# Altium PCB COREV1.1_pcb5_0.PcbDoc (part 2 of 14)
Units mil, origin at the board's own origin, x right, y up, seen from the top; angles counter-clockwise.
Board outline 2860 x 2420 mil, 6 copper layers (Top Layer, GND, SIGNAL_1, SIGNAL_2, POWER, Bottom Layer); 110 components, 241 nets, 882 pads, 697 vias.
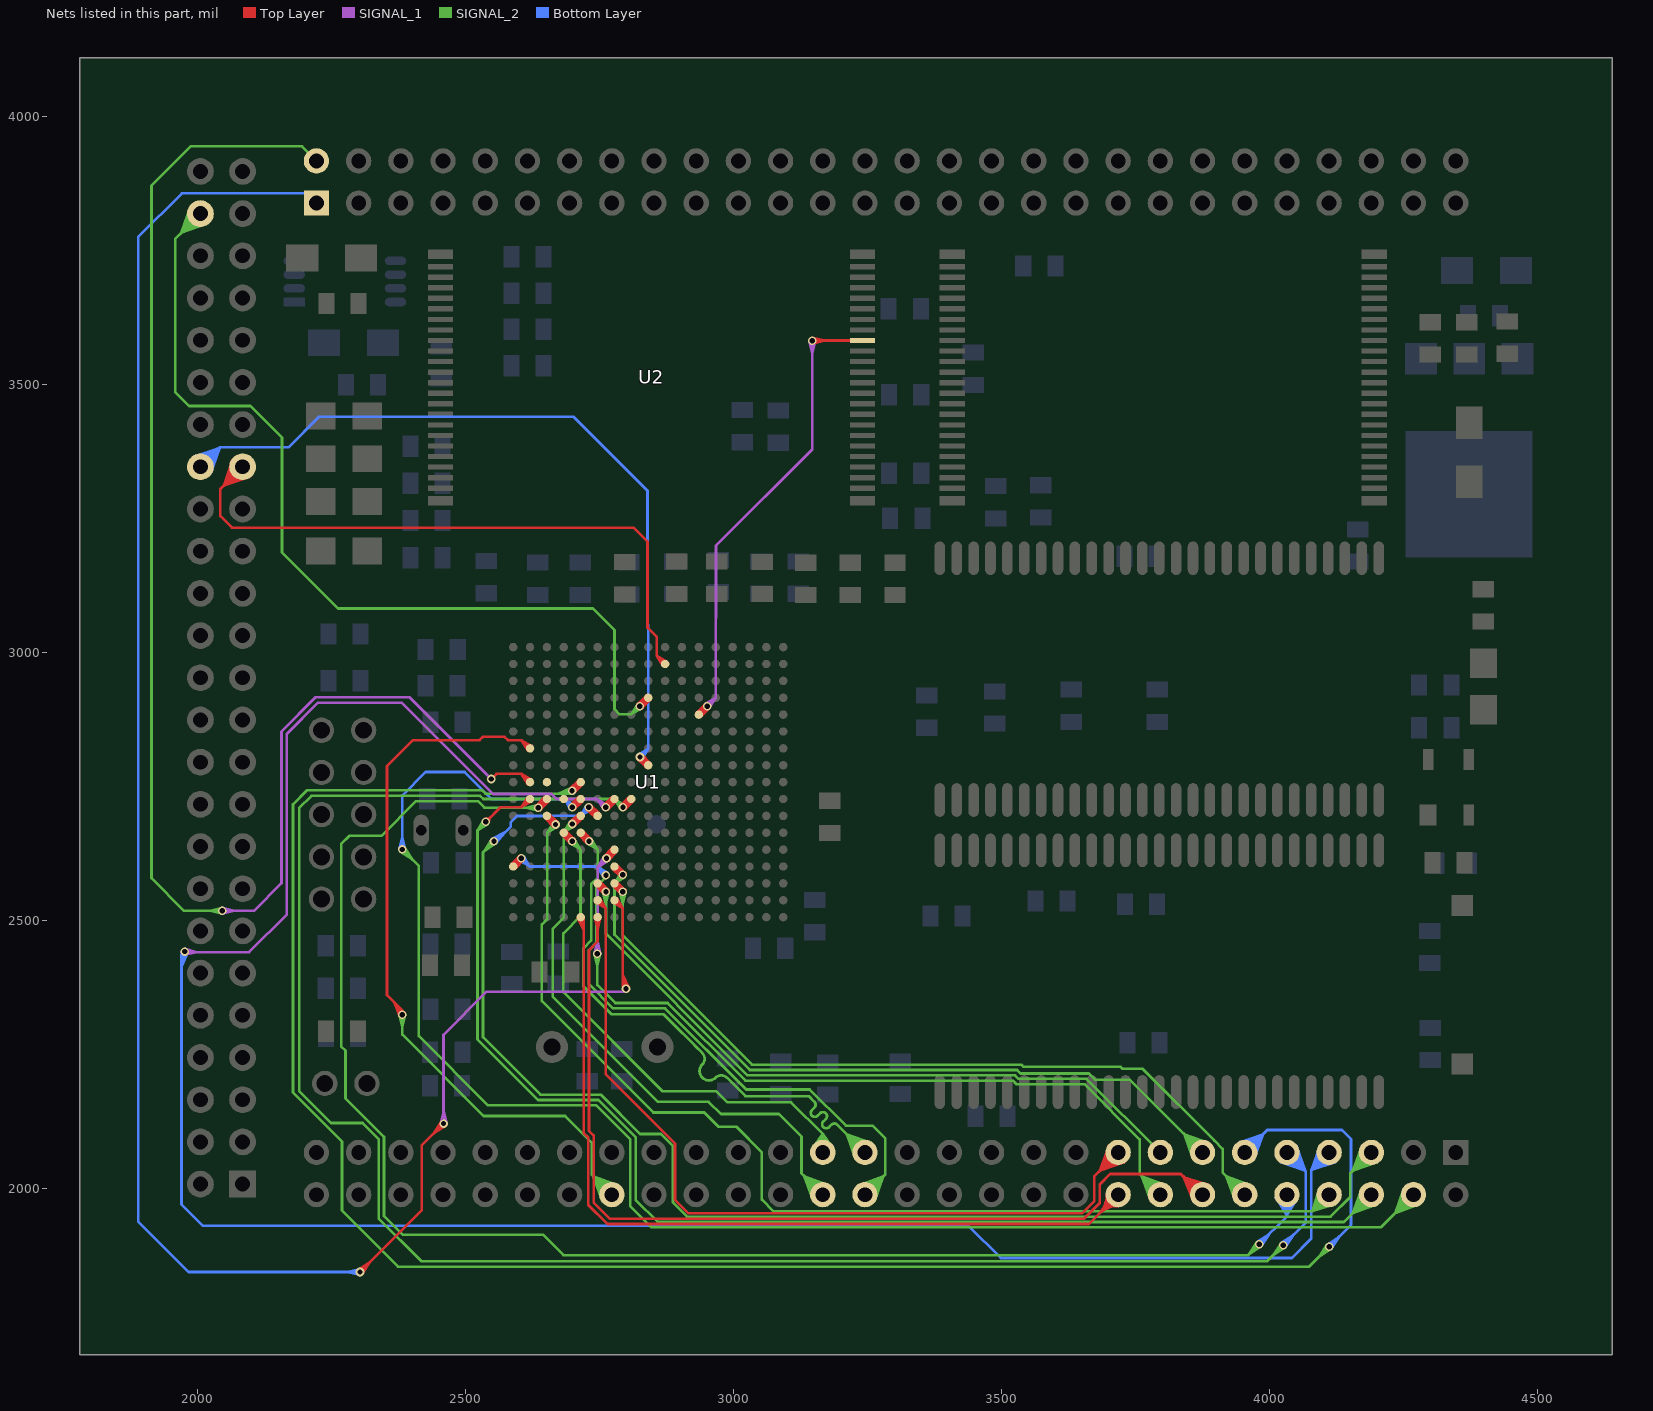
[diagram p6: the nets of this part, all layers, seen from the top]

## Via types
v1: diameter 16, hole 10, Top Layer to Bottom Layer, tented both sides, 638 vias
v2: diameter 30, hole 18, Top Layer to Bottom Layer, tented both sides, 56 vias
v3: diameter 16, hole 10, Top Layer to Bottom Layer, 2 vias
v4: diameter 30, hole 16, Top Layer to Bottom Layer, tented both sides, 1 vias

## Nets (pads, with @x,y where several pads share a name; then routed paths per layer and width w, separated by ;. In a path a pad name is that pad's centre, name@x,y a point inside that pad or via, vN(x,y) a via of type N, cw(c..) or ccw(c..) an arc to the next point about the centre after c; other vN are vias at no path point) (continued)
CAMDATA6: pad.PB36 U1.J8 | length 3053.7
  Top Layer w5: v1@2821.19,2801.61 U1.J8@2836.65,2786.33 ; v1@2823.32,2799.96 U1.J8@2844.19,2793.87 ; v1@2825.52,2799.5 cw(c2825.52,2786.22) 2834.91,2795.61 cw(c2844.29,2805) v1@2831.02,2805 ; v1@2828.91,2809.33 U1.J8@2844.19,2793.87 ; v1@2830.56,2807.2 U1.J8@2836.65,2786.33 ; U1.J8@2835.51,2789.63 ccw(c2822.54,2789.63) 2831.71,2798.8 ccw(c2840.89,2807.98) U1.J8@2840.89,2795 ; v1(2825.52,2805) U1.J8@2840.89,2789.63 ; v1(2825.52,2805) U1.J8@2844.19,2793.87 ; v1(2825.52,2805) U1.J8@2836.65,2786.33 ; v1(2825.52,2805) U1.J8@2840.89,2789.63 ; U1.J8@2840.89,2789.63 2822.15,2800.65 U1.J8@2840.89,2789.63 ; U1.J8@2840.89,2789.63 2829.87,2808.37 U1.J8@2840.89,2789.63
  Bottom Layer w5: pad.PB36@1993.31,3365.64 2040.87,3382.19 ; pad.PB36@1993.59,3365.82 2038.68,3380 ; pad.PB36@1995.22,3360.92 2040.87,3382.19 ; pad.PB36@1995.39,3361.03 2038.68,3380 ; pad.PB36@1997.59,3356.45 2040.87,3382.19 ; pad.PB36@1997.67,3356.51 2038.68,3380 ; pad.PB36@2000.37,3352.27 2040.87,3382.19 ; pad.PB36@2000.39,3352.29 2038.68,3380 ; pad.PB36@2005.78,3359.07 ccw(c2006.88,3385.22) 2025.39,3366.71 ccw(c2043.9,3348.21) pad.PB36@2017.75,3347.11 ; pad.PB36@2005.99,3364.07 ccw(c2007.53,3400.68) 2033.44,3374.77 ccw(c2059.36,3348.86) pad.PB36@2022.74,3347.32 ; pad.PB36@2006.2,3369.06 ccw(c2008.18,3416.13) 2041.5,3382.82 ; pad.PB36@2006.55,3359.02 ccw(c2008.75,3380.22) 2023.82,3365.15 ccw(c2038.9,3350.07) pad.PB36@2017.69,3347.87 ; pad.PB36@2007.06,3363.99 ccw(c2010.14,3393.68) 2031.25,3372.57 ccw(c2052.36,3351.46) pad.PB36@2022.67,3348.39 ; pad.PB36@2007.58,3368.96 ccw(c2011.54,3407.14) 2038.68,3380 ; pad.PB36@2015.13,3338.91 2040.87,3382.19 ; pad.PB36@2015.19,3338.99 2038.68,3380 ; pad.PB36@2019.6,3336.55 2040.87,3382.19 ; pad.PB36@2019.71,3336.71 2038.68,3380 ; pad.PB36@2024.32,3334.63 2040.87,3382.19 ; pad.PB36@2024.5,3334.92 2038.68,3380 ; pad.PB36@2027.64,3348.9 cw(c2065.82,3352.86) 2038.68,3380 ; pad.PB36@2027.74,3347.53 cw(c2074.81,3349.51) 2041.5,3382.82 ; v1@2822.15,2809.35 2840.89,2820.37 ; v1(2825.52,2805) 2840.89,2820.37 ; v1@2825.52,2810.5 ccw(c2825.52,2823.78) 2834.91,2814.39 ccw(c2844.29,2805) v1@2831.02,2805 ; v1@2829.87,2801.63 2840.89,2820.37 ; 2840.89,3010.1 2840.89,2926 ; 2038.68,3380 2010.97,3341.72 2040.87,3382.19 ; 2038.68,3380 pad.PB36@2005.26,3346.58 2041.5,3382.82 ; 2041.5,3382.82 2169.61,3382.82 2226.78,3440 2701.36,3440 2839.5,3301.86 2839.5,3052.58 2840.89,3051.19 2840.89,2926 ; 2840.89,2820.37 2840.89,2926
CAMDATA7: pad.PB35 U1.H2 | length 1857.2
  Top Layer w5: pad.PB35@2061.5,3346.58 cw(c2007.18,3346.58) 2045.59,3308.17 cw(c2084,3269.76) pad.PB35@2084,3324.08 ; pad.PB35@2064.94,3358.54 2048.39,3310.98 ; pad.PB35@2066.5,3346.58 cw(c2024.25,3346.58) 2054.13,3316.71 cw(c2084,3286.83) pad.PB35@2084,3329.08 ; pad.PB35@2069.66,3356.62 2048.39,3310.98 ; pad.PB35@2071.5,3346.58 cw(c2041.32,3346.58) 2062.66,3325.24 cw(c2084,3303.9) pad.PB35@2084,3334.08 ; pad.PB35@2074.13,3354.26 2048.39,3310.98 ; pad.PB35@2078.32,3351.48 2048.39,3310.98 ; pad.PB35@2084,3346.58 2042.5,3305.08 2042.5,3254.5 2064,3233 2813.83,3233 2839.5,3207.33 2839.5,3046.5 2857,3029 2857,2993.99 ; pad.PB35@2088.89,3340.9 2048.39,3310.98 ; pad.PB35@2091.67,3336.71 2048.39,3310.98 ; pad.PB35@2094.04,3332.25 2048.39,3310.98 ; pad.PB35@2095.95,3327.52 2048.39,3310.98 ; U1.H2@2867.01,2978.61 ccw(c2854.03,2978.61) 2863.21,2987.78 ccw(c2872.38,2996.95) U1.H2@2872.38,2983.98 ; U1.H2@2868.14,2975.3 2857,2993.99 ; U1.H2@2872.38,2980.12 U1.H2@2872.38,2978.61 ; U1.H2@2875.68,2982.85 2857,2993.99 ; 2857,2993.99 U1.H2@2872.38,2978.61 ; 2857,2993.99 U1.H2@2872.38,2978.61
CAMRST: pad.PB48 U1.J4 | length 2732.9
  Top Layer w5: v1@2820.95,2903.4 U1.J4@2836.65,2918.92 ; v1@2823.05,2905.03 U1.J4@2844.2,2911.38 ; v1@2825.27,2905.5 ccw(c2825.27,2918.78) 2834.66,2909.39 ccw(c2844.05,2900) v1@2830.77,2900 ; v1@2828.67,2895.68 U1.J4@2844.2,2911.38 ; v1@2830.3,2897.77 U1.J4@2836.65,2918.92 ; U1.J4@2835.51,2915.61 cw(c2822.54,2915.61) 2831.71,2906.44 cw(c2840.89,2897.27) U1.J4@2840.89,2910.24 ; v1(2825.27,2900) U1.J4@2840.89,2915.61 ; v1(2825.27,2900) U1.J4@2836.65,2918.92 ; v1(2825.27,2900) U1.J4@2844.2,2911.38 ; v1(2825.27,2900) U1.J4@2840.89,2915.61 ; U1.J4@2840.89,2915.61 2829.62,2896.63 U1.J4@2840.89,2915.61 ; U1.J4@2840.89,2915.61 2821.9,2904.34 U1.J4@2840.89,2915.61
  SIGNAL_2 w5: pad.PB48@1982.76,3819.02 cw(c1928.44,3819.02) 1966.85,3780.61 cw(c2005.26,3742.2) pad.PB48@2005.26,3796.52 ; pad.PB48@1986.2,3830.98 1969.65,3783.42 ; pad.PB48@1987.76,3819.02 cw(c1945.51,3819.02) 1975.39,3789.15 cw(c2005.26,3759.28) pad.PB48@2005.26,3801.52 ; pad.PB48@1990.92,3829.06 1969.65,3783.42 ; pad.PB48@1992.76,3819.02 cw(c1962.58,3819.02) 1983.92,3797.69 cw(c2005.26,3776.35) pad.PB48@2005.26,3806.52 ; pad.PB48@1995.39,3826.7 1969.65,3783.42 ; pad.PB48@1999.58,3823.92 1969.65,3783.42 ; pad.PB48@2010.15,3813.34 1969.65,3783.42 ; pad.PB48@2012.93,3809.16 1969.65,3783.42 ; pad.PB48@2015.3,3804.69 1969.65,3783.42 ; pad.PB48@2017.21,3799.96 1969.65,3783.42 ; 2815.04,2890.26 cw(c2825.27,2880.02) v1@2825.27,2894.5 ; 2816.23,2891.46 ccw(c2807.69,2900) v1@2819.77,2900 ; v1@2820.98,2903.44 2809.52,2884.74 ; v1@2828.57,2895.6 2809.52,2884.74 ; 1969.65,3783.42 pad.PB48@2005.26,3819.02 1958,3771.76 1958,3485.86 1983.86,3460 2098.86,3460 2157.5,3401.36 2157.5,3186.5 2261.89,3082.11 2737.89,3082.11 2778.02,3041.98 2778.02,2894.32 2787.6,2884.74 2809.52,2884.74 ; 2809.52,2884.74 v1(2825.27,2900) 2824.78,2900 2809.52,2884.74
CDCLK: pad.PA42 U1.T7 | length 2210.4
  Top Layer w5: 2366.9,2347.18 cw(c2343.72,2324) v1@2376.5,2324 ; 2375.43,2338.65 cw(c2360.79,2324) v1@2381.5,2324 ; v1@2377.11,2321.48 2366.99,2347.09 ; v1@2386.29,2327.44 2366.99,2347.09 ; 2609.96,2830.83 ccw(c2620.41,2841.28) U1.T7@2620.41,2826.5 ; 2611.77,2829.02 cw(c2603.87,2821.13) U1.T7@2615.04,2821.13 ; U1.T7@2616.26,2817.71 2604.29,2836.5 ; U1.T7@2623.62,2825.43 2604.29,2836.5 ; 2366.99,2347.09 v1(2382,2324) 2382,2332.08 2353.5,2360.58 2353.5,2787.93 2402.07,2836.5 2526,2836.5 2532.12,2842.62 2573,2842.62 2579.12,2836.5 2604.29,2836.5 ; 2604.29,2836.5 U1.T7@2620.41,2821.13 2619.66,2821.13 2604.29,2836.5
  SIGNAL_2 w5: v1@2376.54,2323.34 2382,2301 v1@2387.46,2323.34 ; v1@2378.11,2320.11 cw(c2368.72,2310.72) 2382,2310.72 cw(c2395.28,2310.72) v1@2385.89,2320.11 ; v1(2382,2324) 2382,2286.8 2533.8,2135 2686,2135 2735.36,2085.64 2735.36,2025.93 pad.PA42@2772.98,1988.32 ; pad.PA42@2751.85,1988.32 ccw(c2700.86,1988.32) 2736.92,2024.37 ccw(c2772.98,2060.43) pad.PA42@2772.98,2009.44 ; pad.PA42@2755.14,1977 2738.75,2022.54 ; pad.PA42@2756.85,1988.32 ccw(c2717.93,1988.32) 2745.45,2015.84 ccw(c2772.98,2043.36) pad.PA42@2772.98,2004.44 ; pad.PA42@2759.84,1978.97 2738.75,2022.54 ; pad.PA42@2761.85,1988.32 ccw(c2735,1988.32) 2753.99,2007.3 ccw(c2772.98,2026.29) pad.PA42@2772.98,1999.44 ; pad.PA42@2764.26,1981.41 2738.75,2022.54 ; pad.PA42@2768.38,1984.27 2738.75,2022.54 ; pad.PA42@2777.02,1992.91 2738.75,2022.54 ; pad.PA42@2779.89,1997.03 2738.75,2022.54 ; pad.PA42@2782.32,2001.46 2738.75,2022.54 ; pad.PA42@2784.29,2006.15 2738.75,2022.54
CLE: U1.F5 U2.16 | length 1439.8
  Top Layer w5: U1.F5@2935.37,2889.49 ccw(c2935.37,2902.47) 2944.55,2893.29 ccw(c2953.72,2884.12) U1.F5@2940.75,2884.12 ; 2941.43,2890.17 ccw(c2931.6,2900) v1@2945.5,2900 ; 2942.05,2890.79 cw(c2951,2881.84) v1@2951,2894.5 ; v1@2945.96,2902.2 U1.F5@2939.61,2880.81 ; v1@2946.63,2903.34 U1.F5@2935.37,2884.12 ; v1@2947.56,2904.29 U1.F5@2932.06,2888.35 ; v1@2953.28,2894.99 U1.F5@2932.06,2888.35 ; v1@2954.41,2895.69 U1.F5@2935.37,2884.12 ; v1@2955.35,2896.63 U1.F5@2939.61,2880.81 ; v1@3147.47,3586.98 3170.03,3582.26 ; v1@3147.84,3576.06 3170.03,3582.26 ; v1@3150.89,3577.61 cw(c3162.12,3566.38) 3162.12,3582.26 ; v1@3150.89,3585.39 ccw(c3158.43,3592.93) 3158.43,3582.26 ; 3202.2,3582.26 U2.16@3222.13,3582.26 ; U2.16@3220.41,3580.55 ccw(c3216.28,3576.42) 3216.28,3582.26 ccw(c3216.28,3588.11) U2.16@3220.41,3583.98 ; U2.16@3240.83,3582.26 3147.76,3582.26 v1(3147,3581.5) 3170.03,3582.26 ; U1.F5@2932.06,2888.35 v1(2951,2900) ; U1.F5@2932.06,2888.35 v1@2951,2899.74 ; U1.F5@2935.37,2884.12 v1(2951,2900) ; U1.F5@2935.37,2884.12 v1@2951,2899.74 ; U1.F5@2939.61,2880.81 v1(2951,2900) ; U1.F5@2939.61,2880.81 v1@2951,2899.74 ; v1@2951,2899.74 v1(2951,2900)
  SIGNAL_1 w5: v1@2947.62,2904.34 2966.87,2915.87 ; v1(2951,2900) 2966.87,2915.87 ; v1@2951,2905.5 ccw(c2951,2918.78) 2960.39,2909.39 ccw(c2969.78,2900) v1@2956.5,2900 ; v1@2955.34,2896.62 2966.87,2915.87 ; v1@3141.54,3580.84 3147,3558.5 ; v1@3143.11,3577.61 cw(c3133.72,3568.22) 3147,3568.22 cw(c3160.28,3568.22) v1@3150.89,3577.61 ; v1@3152.46,3580.84 3147,3558.5 ; 2966.87,2915.87 2966.87,3063.95 2967.5,3064.58 2967.5,3199.64 3147,3379.14 v1(3147,3581.5) 3147,3558.5
CLKOUT0: U1.R9
CLKOUT1: U1.P10
DN0: pad.PA31 U1.P12 | length 1640.8
  Top Layer w5: U1.P12@2683.41,2658.27 cw(c2683.41,2645.3) 2692.58,2654.47 cw(c2701.75,2663.65) U1.P12@2688.78,2663.65 ; v1@2693.5,2648.05 ccw(c2680.22,2648.05) 2689.61,2657.44 ccw(c2699,2666.83) v1@2699,2653.55 ; v1@2693.97,2645.83 U1.P12@2687.64,2666.95 ; v1@2694.66,2644.68 U1.P12@2683.41,2663.65 ; v1@2695.6,2643.73 U1.P12@2680.1,2659.41 ; v1@2701.22,2653.08 U1.P12@2680.1,2659.41 ; v1@2702.37,2652.4 U1.P12@2683.41,2663.65 ; v1@2703.32,2651.45 U1.P12@2687.64,2666.95 ; U1.P12@2680.1,2659.41 v1(2699,2648.05) ; U1.P12@2680.1,2659.41 v1(2699,2648.05) ; U1.P12@2683.41,2663.65 v1(2699,2648.05) ; U1.P12@2683.41,2663.65 v1(2699,2648.05) ; U1.P12@2687.64,2666.95 v1(2699,2648.05) ; U1.P12@2687.64,2666.95 v1(2699,2648.05)
  SIGNAL_2 w5: v1@2695.63,2643.71 2714.56,2632.49 ; v1@2699,2642.55 cw(c2699,2629.27) 2708.39,2638.66 cw(c2717.78,2648.05) v1@2704.5,2648.05 ; v1(2699,2648.05) 2714.56,2632.49 ; v1@2703.34,2651.42 2714.56,2632.49 ; pad.PA31@3146.59,2073.58 3166.68,2101.24 ; pad.PA31@3151.01,2070.86 3166.68,2101.24 ; pad.PA31@3155.7,2068.87 3166.68,2101.24 ; pad.PA31@3157.23,2085.95 ccw(c3149.58,2101.24) 3166.68,2101.24 ; pad.PA31@3159.46,2081.47 ccw(c3153.62,2093.15) 3166.68,2093.15 ccw(c3179.73,2093.15) pad.PA31@3173.89,2081.47 ; pad.PA31@3160.58,2067.6 3166.68,2101.24 ; pad.PA31@3166.68,2067.06 3166.68,2101.24 ; pad.PA31@3172.78,2067.6 3166.68,2101.24 ; pad.PA31@3176.13,2085.95 cw(c3183.78,2101.24) 3166.68,2101.24 ; pad.PA31@3177.65,2068.87 3166.68,2101.24 ; pad.PA31@3182.35,2070.86 3166.68,2101.24 ; pad.PA31@3186.77,2073.58 3166.68,2101.24 ; 2714.56,2632.49 2714.56,2507.98 2682.5,2475.92 2682.5,2366.07 2867.07,2181.5 2967.58,2181.5 2988.58,2160.5 3107.42,2160.5 3166.68,2101.24
DN1: pad.PA29 U1.N12 | length 2010.2
  Top Layer w5: U1.N12@2714.9,2658.27 cw(c2714.9,2645.3) 2724.08,2654.47 cw(c2733.25,2663.65) U1.N12@2720.28,2663.65 ; v1@2725,2648.05 ccw(c2711.72,2648.05) 2721.11,2657.44 ccw(c2730.5,2666.83) v1@2730.5,2653.55 ; v1@2725.47,2645.82 U1.N12@2719.14,2666.95 ; v1@2726.16,2644.67 U1.N12@2714.9,2663.65 ; v1@2727.1,2643.72 U1.N12@2711.59,2659.41 ; v1@2732.72,2653.08 U1.N12@2711.59,2659.41 ; v1@2733.87,2652.39 U1.N12@2714.9,2663.65 ; v1@2734.82,2651.45 U1.N12@2719.14,2666.95 ; U1.N12@2711.59,2659.41 v1(2730.5,2648.05) ; U1.N12@2711.59,2659.41 v1(2730.5,2648.05) ; U1.N12@2714.9,2663.65 v1(2730.5,2648.05) ; U1.N12@2714.9,2663.65 v1(2730.5,2648.05) ; U1.N12@2719.14,2666.95 v1(2730.5,2648.05) ; U1.N12@2719.14,2666.95 v1(2730.5,2648.05)
  SIGNAL_2 w5: v1@2727.11,2643.72 2746.55,2632 ; v1@2730.5,2642.55 cw(c2730.5,2629.27) 2739.89,2638.66 cw(c2749.28,2648.05) v1@2736,2648.05 ; v1(2730.5,2648.05) 2746.55,2632 ; v1@2734.83,2651.44 2746.55,2632 ; 2927.6,2266.59 2941.87,2252.31 ; 3172.29,2129.57 3167.69,2124.97 ccw(c3173,2119.67) 3167.69,2114.37 ccw(c3173,2119.67) 3178.3,2114.36 3182.9,2118.97 cw(c3188.2,2113.66) 3193.5,2118.97 ; 3172.3,2129.58 ccw(c3166.99,2134.88) 3172.29,2140.18 ccw(c3166.99,2134.88) 3161.69,2140.18 3157.09,2135.58 cw(c3151.78,2140.88) 3146.48,2135.58 cw(c3151.78,2140.88) 3146.48,2146.18 3151.08,2150.79 ccw(c3145.78,2156.09) 3151.08,2161.39 3140.47,2172 3022.19,2172 2987.56,2206.62 ccw(c2977.09,2196.15) 2966.62,2206.62 cw(c2954.25,2219) 2941.87,2206.62 cw(c2954.25,2219) 2941.87,2231.37 ccw(c2931.41,2241.84) 2941.87,2252.31 ; 3198.81,2113.66 3193.51,2118.97 ; pad.PA29@3224.3,2067.06 ccw(c3173.3,2067.06) 3209.36,2103.11 ccw(c3245.42,2139.17) pad.PA29@3245.42,2088.18 ; pad.PA29@3227.58,2055.74 3211.19,2101.28 ; pad.PA29@3229.3,2067.06 ccw(c3190.37,2067.06) 3217.9,2094.58 ccw(c3245.42,2122.1) pad.PA29@3245.42,2083.18 ; pad.PA29@3232.28,2057.71 3211.19,2101.28 ; pad.PA29@3234.3,2067.06 ccw(c3207.45,2067.06) 3226.43,2086.04 ccw(c3245.42,2105.03) pad.PA29@3245.42,2078.18 ; pad.PA29@3236.7,2060.15 3211.19,2101.28 ; pad.PA29@3240.82,2063.01 3211.19,2101.28 ; pad.PA29@3245.42,2067.06 3193.51,2118.97 ; pad.PA29@3249.46,2071.65 3211.19,2101.28 ; pad.PA29@3252.33,2075.77 3211.19,2101.28 ; pad.PA29@3254.76,2080.2 3211.19,2101.28 ; pad.PA29@3256.74,2084.89 3211.19,2101.28 ; 2746.55,2632 2746.55,2609.58 2746.5,2609.53 2746.5,2579.58 2734.56,2567.64 2734.56,2462.62 2720.02,2448.08 2720.02,2377.2 2772.22,2325 2869.19,2325 2941.87,2252.31
DP0: pad.PA32 U1.N11 | length 2083
  Top Layer w5: v1@2694.76,2683.5 U1.N11@2710.66,2698.44 ; v1@2696.9,2685.08 U1.N11@2718.2,2690.9 ; v1@2699,2685.5 ccw(c2699,2700.61) U1.N11@2709.69,2689.93 ; v1@2702.29,2675.59 U1.N11@2718.2,2690.9 ; v1@2703.98,2677.67 U1.N11@2710.66,2698.44 ; v1@2704.5,2680 cw(c2715.94,2680) 2707.85,2688.09 ; U1.N11@2709.53,2695.14 cw(c2696.55,2695.14) 2705.73,2685.97 cw(c2714.9,2676.79) U1.N11@2714.9,2689.77 ; v1(2699,2680) U1.N11@2718.2,2690.9 ; v1(2699,2680) U1.N11@2714.9,2695.14 ; v1(2699,2680) U1.N11@2710.66,2698.44 ; v1(2699,2680) U1.N11@2714.9,2695.14 ; v1(2699,2680) v1@2699.76,2680 ; v1@2699.76,2680 U1.N11@2714.9,2695.14 ; v1@2699.76,2680 U1.N11@2710.66,2698.44 ; v1@2699.76,2680 U1.N11@2718.2,2690.9 ; v1@2699.76,2680 U1.N11@2714.9,2695.14 ; U1.N11@2714.9,2695.14 2703.26,2676.52 U1.N11@2714.9,2695.14 ; U1.N11@2714.9,2695.14 2695.74,2684.43 U1.N11@2714.9,2695.14
  SIGNAL_2 w5: v1@2693.5,2680 cw(c2680.22,2680) 2689.61,2670.61 cw(c2699,2661.22) v1@2699,2674.5 ; v1@2694.65,2683.37 2683.5,2664.5 ; v1@2702.37,2675.65 2683.5,2664.5 ; pad.PA32@3145.56,1988.32 ccw(c3094.56,1988.32) 3130.62,2024.37 ccw(c3166.68,2060.43) pad.PA32@3166.68,2009.44 ; pad.PA32@3148.84,1977 3132.45,2022.54 ; pad.PA32@3150.56,1988.32 ccw(c3111.63,1988.32) 3139.16,2015.84 ccw(c3166.68,2043.36) pad.PA32@3166.68,2004.44 ; pad.PA32@3153.54,1978.97 3132.45,2022.54 ; pad.PA32@3155.56,1988.32 ccw(c3128.71,1988.32) 3147.69,2007.3 ccw(c3166.68,2026.29) pad.PA32@3166.68,1999.44 ; pad.PA32@3157.96,1981.41 3132.45,2022.54 ; pad.PA32@3162.08,1984.27 3132.45,2022.54 ; pad.PA32@3166.68,1988.32 3127,2027.99 3127,2096.5 3084.82,2138.68 2976.61,2138.68 2953.8,2161.5 2858.78,2161.5 2662.5,2357.78 2662.5,2484.2 2683.5,2505.2 2683.5,2664.5 ; pad.PA32@3170.72,1992.91 3132.45,2022.54 ; pad.PA32@3173.59,1997.03 3132.45,2022.54 ; pad.PA32@3176.02,2001.46 3132.45,2022.54 ; pad.PA32@3178,2006.15 3132.45,2022.54 ; 2683.5,2664.5 v1(2699,2680) 2683.5,2664.5
DP1: pad.PA30 U1.U14 | length 2206.7
  Top Layer w5: U1.U14@2588.92,2606.03 ccw(c2588.92,2619) 2598.09,2609.83 ccw(c2607.26,2600.65) U1.U14@2594.29,2600.65 ; v1@2598.76,2616 cw(c2585.48,2616) 2594.87,2606.61 cw(c2604.26,2597.22) v1@2604.26,2610.5 ; v1@2599.22,2618.19 U1.U14@2593.16,2597.35 ; v1@2599.91,2619.36 U1.U14@2588.92,2600.65 ; v1@2600.87,2620.33 U1.U14@2585.62,2604.9 ; v1@2606.45,2610.96 U1.U14@2585.62,2604.9 ; v1@2607.63,2611.65 U1.U14@2588.92,2600.65 ; v1@2608.59,2612.61 U1.U14@2593.16,2597.35 ; U1.U14@2585.62,2604.9 v1(2604.26,2616) ; U1.U14@2585.62,2604.9 v1(2604.26,2616) ; U1.U14@2588.92,2600.65 v1(2604.26,2616) ; U1.U14@2588.92,2600.65 v1(2604.26,2616) ; U1.U14@2593.16,2597.35 v1(2604.26,2616) ; U1.U14@2593.16,2597.35 v1(2604.26,2616)
  SIGNAL_2 w5: v1(2762,2584.5) 2762,2580.94 2744.56,2563.5 2744.56,2458.48 2730.02,2443.94 2730.02,2381.34 2775.36,2336 2872.33,2336 3023.83,2184.5 3142.12,2184.5 3209.62,2117 3259.5,2117 3283.5,2093 3283.5,2026.4 pad.PA30@3245.42,1988.32 ; pad.PA30@3234.1,2006.15 3279.65,2022.54 ; pad.PA30@3236.08,2001.46 3279.65,2022.54 ; pad.PA30@3238.51,1997.03 3279.65,2022.54 ; pad.PA30@3241.37,1992.91 3279.65,2022.54 ; pad.PA30@3245.42,1999.44 ccw(c3245.42,2026.29) 3264.4,2007.3 ccw(c3283.39,1988.32) pad.PA30@3256.54,1988.32 ; pad.PA30@3245.42,2004.44 ccw(c3245.42,2043.36) 3272.94,2015.84 ccw(c3300.46,1988.32) pad.PA30@3261.54,1988.32 ; pad.PA30@3245.42,2009.44 ccw(c3245.42,2060.43) 3281.48,2024.37 ccw(c3317.53,1988.32) pad.PA30@3266.54,1988.32 ; pad.PA30@3250.01,1984.27 3279.65,2022.54 ; pad.PA30@3254.13,1981.41 3279.65,2022.54 ; pad.PA30@3258.56,1978.97 3279.65,2022.54 ; pad.PA30@3263.25,1977 3279.65,2022.54
  Bottom Layer w5: v1@2600.9,2611.65 2619.48,2600.78 ; v1@2604.26,2610.5 cw(c2604.26,2597.22) 2613.65,2606.61 cw(c2623.04,2616) v1@2609.76,2616 ; v1(2604.26,2616) 2619.48,2600.78 ; v1@2608.62,2619.36 2619.48,2600.78 ; v1@2756.5,2584.5 ccw(c2743.22,2584.5) 2752.61,2593.89 ccw(c2762,2603.28) v1@2762,2590 ; v1@2757.67,2581.1 2745.72,2600.78 ; v1@2765.4,2588.83 2745.72,2600.78 ; 2619.48,2600.78 2745.72,2600.78 ; 2745.72,2600.78 v1(2762,2584.5) 2745.72,2600.78
EINT0: pad.PA18 U1.N17 | length 1876.6
  Top Layer w5: U1.N17@2709.82,2504.42 2720.5,2481.57 ; U1.N17@2711.1,2502.36 cw(c2688.41,2479.68) 2720.5,2479.68 ; U1.N17@2714.64,2505.9 cw(c2700.48,2491.75) 2720.5,2491.75 ; U1.N17@2717.03,2501.23 cw(c2718.28,2498.34) 2720.5,2500.57 ; U1.N17@2719.84,2504.03 ccw(c2722.72,2502.79) 2720.5,2500.57 ; U1.N17@2720.24,2506.79 2720.5,2481.57 ; pad.PA18@3696.74,1988.32 cw(c3645.74,1988.32) 3681.8,1952.26 cw(c3717.86,1916.2) pad.PA18@3717.86,1967.19 ; pad.PA18@3701.74,1988.32 cw(c3662.81,1988.32) 3690.34,1960.79 cw(c3717.86,1933.27) pad.PA18@3717.86,1972.19 ; pad.PA18@3706.74,1988.32 cw(c3679.89,1988.32) 3698.87,1969.33 cw(c3717.86,1950.34) pad.PA18@3717.86,1977.19 ; pad.PA18@3717.86,1988.32 3663.04,1933.5 2764.86,1933.5 2729,1969.36 2729,2094.86 2720.5,2103.36 2720.5,2500.57 ; 2720.5,2481.57 U1.N17@2714.9,2506.16 2720.5,2500.57
EINT1: pad.PA17 U1.M16 | length 2213.3
  Top Layer w5: U1.M16@2743.1,2533.42 2761.77,2522.29 ; U1.M16@2746.4,2532.29 cw(c2746.4,2519.31) 2755.57,2528.49 cw(c2764.75,2537.66) U1.M16@2751.77,2537.66 ; U1.M16@2746.4,2537.66 2761.77,2522.29 ; U1.M16@2750.64,2540.96 2761.77,2522.29 ; pad.PA17@3696.74,2067.06 cw(c3645.74,2067.06) 3681.8,2031 cw(c3717.86,1994.94) pad.PA17@3717.86,2045.93 ; pad.PA17@3700.02,2078.37 3683.63,2032.83 ; pad.PA17@3701.74,2067.06 cw(c3662.81,2067.06) 3690.34,2039.53 cw(c3717.86,2012.01) pad.PA17@3717.86,2050.93 ; pad.PA17@3704.72,2076.4 3683.63,2032.83 ; pad.PA17@3706.74,2067.06 cw(c3679.89,2067.06) 3698.87,2048.07 cw(c3717.86,2029.08) pad.PA17@3717.86,2055.93 ; pad.PA17@3709.14,2073.97 3683.63,2032.83 ; pad.PA17@3713.26,2071.1 3683.63,2032.83 ; pad.PA17@3721.9,2062.46 3683.63,2032.83 ; pad.PA17@3724.77,2058.34 3683.63,2032.83 ; pad.PA17@3727.2,2053.92 3683.63,2032.83 ; pad.PA17@3729.18,2049.22 3683.63,2032.83 ; 2761.77,2522.29 2761.77,2212.73 2891,2083.5 2891,1978.5 2916,1953.5 3650.5,1953.5 3673.5,1976.5 3673.5,2022.7 pad.PA17@3717.86,2067.06 3683.63,2032.83
EINT2: pad.PA16 U1.L13 | length 2640
  Top Layer w5: v1@2758.54,2619.22 U1.L13@2773.53,2635.28 ; v1@2759.46,2620.21 U1.L13@2777.89,2632.15 ; v1@2759.65,2620.36 U1.L13@2777.89,2630.89 ; v1@2760.58,2620.94 U1.L13@2781.37,2628.05 ; v1@2763,2617.26 v1(2763,2616) ; v1@2763,2621.5 ccw(c2763,2634.78) 2772.39,2625.39 ccw(c2781.78,2616) v1@2768.5,2616 ; v1@2766.57,2611.82 U1.L13@2781.37,2628.05 ; v1@2767.36,2612.65 U1.L13@2777.89,2630.89 ; v1@2767.48,2612.81 U1.L13@2777.89,2632.15 ; v1@2767.83,2620.83 ccw(c2756.51,2632.15) U1.L13@2772.52,2632.15 ; v1@2768.12,2613.99 U1.L13@2773.53,2635.28 ; 2770.86,2623.86 cw(c2777.89,2616.83) U1.L13@2777.89,2626.78 ; v1(2763,2616) U1.L13@2777.89,2632.15 ; v1(2763,2616) U1.L13@2773.53,2635.28 ; v1(2763,2616) U1.L13@2781.37,2628.05 ; v1(2763,2616) U1.L13@2777.89,2630.89 ; U1.L13@2777.89,2630.89 U1.L13@2777.89,2632.15
  SIGNAL_1 w5: v1@2740.55,2438.78 2746.5,2461.01 ; v1@2742.11,2441.89 ccw(c2731.51,2452.49) 2746.5,2452.49 ; 2746.5,2450.07 ccw(c2758.07,2450.07) v1@2749.89,2441.89 ; v1@2751.47,2438.54 2746.5,2461.01 ; v1@2757.5,2616 cw(c2744.22,2616) 2753.61,2606.61 cw(c2763,2597.22) v1@2763,2610.5 ; v1@2758.68,2619.4 2746.5,2599.5 ; v1@2766.4,2611.68 2746.5,2599.5 ; 2746.5,2461.01 v1(2746,2438) 2746.5,2438.5 2746.5,2599.5 ; 2746.5,2599.5 v1(2763,2616) 2746.5,2599.5
  SIGNAL_2 w5: v1@2740.54,2437.34 2746,2415 ; v1@2742.11,2434.11 cw(c2732.72,2424.72) 2746,2424.72 cw(c2759.28,2424.72) v1@2749.89,2434.11 ; v1@2751.46,2437.34 2746,2415 ; pad.PA16@3775.48,1988.32 ccw(c3724.48,1988.32) 3760.54,2024.37 ccw(c3796.6,2060.43) pad.PA16@3796.6,2009.44 ; pad.PA16@3778.76,1977 3762.37,2022.54 ; pad.PA16@3780.48,1988.32 ccw(c3741.55,1988.32) 3769.08,2015.84 ccw(c3796.6,2043.36) pad.PA16@3796.6,2004.44 ; pad.PA16@3783.46,1978.97 3762.37,2022.54 ; pad.PA16@3785.48,1988.32 ccw(c3758.63,1988.32) 3777.61,2007.3 ccw(c3796.6,2026.29) pad.PA16@3796.6,1999.44 ; pad.PA16@3787.88,1981.41 3762.37,2022.54 ; pad.PA16@3792,1984.27 3762.37,2022.54 ; pad.PA16@3796.6,1988.32 3758,2026.91 3758,2091.51 3655.01,2194.5 3527.72,2194.5 3521.22,2201 3022.15,2201 2877.15,2346 2779.5,2346 2746,2379.5 v1(2746,2438) 2746,2415 ; pad.PA16@3800.64,1992.91 3762.37,2022.54 ; pad.PA16@3803.51,1997.03 3762.37,2022.54 ; pad.PA16@3805.94,2001.46 3762.37,2022.54 ; pad.PA16@3807.92,2006.15 3762.37,2022.54
EINT3: pad.PA15 U1.M15 | length 1655.2
  Top Layer w5: U1.M15@2746.4,2563.78 cw(c2746.4,2550.81) 2755.57,2559.98 cw(c2764.75,2569.16) U1.M15@2751.77,2569.16 ; 2752.57,2562.98 cw(c2743.09,2553.5) v1@2756.5,2553.5 ; 2752.71,2562.85 ccw(c2762,2572.14) v1@2762,2559 ; v1@2756.97,2551.28 U1.M15@2750.63,2572.47 ; v1@2757.65,2550.13 U1.M15@2746.4,2569.16 ; v1@2758.59,2549.18 U1.M15@2743.09,2564.92 ; v1@2764.24,2558.53 U1.M15@2743.09,2564.92 ; v1@2765.38,2557.84 U1.M15@2746.4,2569.16 ; v1@2766.33,2556.89 U1.M15@2750.63,2572.47 ; U1.M15@2743.09,2564.92 v1(2762,2553.5) ; U1.M15@2743.09,2564.92 v1@2762,2553.56 ; U1.M15@2746.4,2569.16 v1(2762,2553.5) ; U1.M15@2746.4,2569.16 v1@2762,2553.56 ; U1.M15@2750.63,2572.47 v1(2762,2553.5) ; U1.M15@2750.63,2572.47 v1@2762,2553.56 ; v1(2762,2553.5) v1@2762,2553.56
  SIGNAL_2 w5: v1@2756.54,2552.84 2762,2530.5 v1@2767.46,2552.84 ; v1@2758.11,2549.61 cw(c2748.72,2540.22) 2762,2540.22 cw(c2775.28,2540.22) v1@2765.89,2549.61 ; v1(2762,2553.5) 2762,2475.3 3026.3,2211 3525.36,2211 3531.86,2204.5 3659.15,2204.5 pad.PA15@3796.6,2067.06
EINT4: pad.PA14 U1.M17 | length 2426.2
  Top Layer w5: U1.M17@2741.06,2505.53 2746.4,2483.29 U1.M17@2751.73,2505.53 ; U1.M17@2742.6,2502.36 cw(c2733.42,2493.19) 2746.4,2493.19 cw(c2759.37,2493.19) U1.M17@2750.2,2502.36 ; U1.M17@2745.65,2506.16 U1.M17@2746.4,2506.16 2746.4,2460.32 2730.5,2444.42 2730.5,2107.5 2739,2099 2739,1973.5 2769,1943.5 3654.64,1943.5 3683.5,1972.36 3683.5,2007.5 3703,2027 3834.68,2027 3873.36,1988.32 pad.PA14@3875.34,1988.32 ; 3835.9,2025.77 ccw(c3875.34,2065.21) pad.PA14@3875.34,2009.44 ; 3844.44,2017.24 ccw(c3875.34,2048.14) pad.PA14@3875.34,2004.44 ; 3849.21,2012.46 cw(c3825.07,1988.32) pad.PA14@3859.22,1988.32 ; 3852.97,2008.7 ccw(c3875.34,2031.06) pad.PA14@3875.34,1999.44 ; pad.PA14@3854.22,1988.32 ccw(c3808,1988.32) 3840.68,2021 ; pad.PA14@3857.8,1976.54 3840.69,2020.98 ; pad.PA14@3862.45,1978.63 3840.69,2020.98 ; pad.PA14@3866.82,1981.17 3840.69,2020.98 ; pad.PA14@3870.86,1984.14 3840.69,2020.98 ; pad.PA14@3875.34,1986.34 pad.PA14@3875.34,1988.32 ; pad.PA14@3879.24,1993.03 3840.69,2020.98 ; pad.PA14@3881.97,1997.24 3840.69,2020.98 ; pad.PA14@3884.25,2001.75 3840.69,2020.98 ; pad.PA14@3886.06,2006.51 3840.69,2020.98 ; 3840.69,2020.98 pad.PA14@3875.34,1988.32
EINT5: pad.PA13 U1.L14 | length 2395.5
  Top Layer w5: U1.L14@2777.89,2595.28 cw(c2777.89,2582.31) 2787.07,2591.48 cw(c2796.24,2600.65) U1.L14@2783.27,2600.65 ; v1@2788,2585.05 ccw(c2774.72,2585.05) 2784.11,2594.44 ccw(c2793.5,2603.83) v1@2793.5,2590.55 ; v1@2788.47,2582.82 U1.L14@2782.13,2603.96 ; v1@2789.16,2581.67 U1.L14@2777.89,2600.65 ; v1@2790.1,2580.72 U1.L14@2774.58,2596.42 ; v1@2795.72,2590.08 U1.L14@2774.58,2596.42 ; v1@2796.87,2589.39 U1.L14@2777.89,2600.65 ; v1@2797.82,2588.45 U1.L14@2782.13,2603.96 ; U1.L14@2774.58,2596.42 v1(2793.5,2585.05) ; U1.L14@2774.58,2596.42 v1(2793.5,2585.05) ; U1.L14@2777.89,2600.65 v1(2793.5,2585.05) ; U1.L14@2777.89,2600.65 v1(2793.5,2585.05) ; U1.L14@2782.13,2603.96 v1(2793.5,2585.05) ; U1.L14@2782.13,2603.96 v1(2793.5,2585.05)
  SIGNAL_2 w5: v1@2788,2585.05 cw(c2774.72,2585.05) 2784.11,2575.66 cw(c2793.5,2566.27) v1@2793.5,2579.55 ; v1@2789.15,2588.42 2778,2569.55 ; v1@2796.87,2580.7 2778,2569.55 ; pad.PA13@3854.22,2067.06 ccw(c3803.22,2067.06) 3839.28,2103.11 ccw(c3875.34,2139.17) pad.PA13@3875.34,2088.18 ; pad.PA13@3857.5,2055.74 3841.11,2101.28 ; pad.PA13@3859.22,2067.06 ccw(c3820.29,2067.06) 3847.82,2094.58 ccw(c3875.34,2122.1) pad.PA13@3875.34,2083.18 ; pad.PA13@3862.2,2057.71 3841.11,2101.28 ; pad.PA13@3864.22,2067.06 ccw(c3837.37,2067.06) 3856.35,2086.04 ccw(c3875.34,2105.03) pad.PA13@3875.34,2078.18 ; pad.PA13@3866.62,2060.15 3841.11,2101.28 ; pad.PA13@3870.74,2063.01 3841.11,2101.28 ; pad.PA13@3879.38,2071.65 3841.11,2101.28 ; pad.PA13@3882.25,2075.77 3841.11,2101.28 ; pad.PA13@3884.68,2080.2 3841.11,2101.28 ; pad.PA13@3886.66,2084.89 3841.11,2101.28 ; 2778,2569.55 v1(2793.5,2585.05) 2778,2569.55 ; 2778,2569.55 2778,2473.44 3030.44,2221 3529.5,2221 3536,2214.5 3663.3,2214.5 3674.8,2203 3739.39,2203 pad.PA13@3875.34,2067.06 3841.11,2101.28
EINT6: pad.PA12 U1.L15 | length 2412.1
  Top Layer w5: U1.L15@2777.89,2563.78 cw(c2777.89,2550.81) 2787.07,2559.98 cw(c2796.24,2569.16) U1.L15@2783.27,2569.16 ; v1@2788,2553.55 ccw(c2774.72,2553.55) 2784.11,2562.94 ccw(c2793.5,2572.33) v1@2793.5,2559.05 ; v1@2788.47,2551.33 U1.L15@2782.13,2572.47 ; v1@2789.16,2550.18 U1.L15@2777.89,2569.16 ; v1@2790.1,2549.23 U1.L15@2774.58,2564.92 ; v1@2795.72,2558.58 U1.L15@2774.58,2564.92 ; v1@2796.87,2557.9 U1.L15@2777.89,2569.16 ; v1@2797.82,2556.95 U1.L15@2782.13,2572.47 ; U1.L15@2774.58,2564.92 v1(2793.5,2553.55) ; U1.L15@2774.58,2564.92 v1(2793.5,2553.55) ; U1.L15@2777.89,2569.16 v1(2793.5,2553.55) ; U1.L15@2777.89,2569.16 v1(2793.5,2553.55) ; U1.L15@2782.13,2572.47 v1(2793.5,2553.55) ; U1.L15@2782.13,2572.47 v1(2793.5,2553.55)
  SIGNAL_2 w5: v1@2788.04,2552.89 2793.5,2530.55 v1@2798.96,2552.89 ; v1@2789.61,2549.66 cw(c2780.22,2540.27) 2793.5,2540.27 cw(c2806.78,2540.27) v1@2797.39,2549.66 ; v1(2793.5,2553.55) 2793.5,2472.08 3034.58,2231 3537.08,2231 3541.36,2226.72 3722.15,2226.72 3725.58,2223.29 3763.57,2223.29 3897.35,2089.5 3897.35,2089.05 3913,2073.41 3913,2029.39 pad.PA12@3954.08,1988.32 ; pad.PA12@3932.96,1988.32 ccw(c3881.96,1988.32) 3918.02,2024.37 ccw(c3954.08,2060.43) pad.PA12@3954.08,2009.44 ; pad.PA12@3936.24,1977 3919.85,2022.54 ; pad.PA12@3937.96,1988.32 ccw(c3899.03,1988.32) 3926.56,2015.84 ccw(c3954.08,2043.36) pad.PA12@3954.08,2004.44 ; pad.PA12@3940.94,1978.97 3919.85,2022.54 ; pad.PA12@3942.96,1988.32 ccw(c3916.11,1988.32) 3935.09,2007.3 ccw(c3954.08,2026.29) pad.PA12@3954.08,1999.44 ; pad.PA12@3945.36,1981.41 3919.85,2022.54 ; pad.PA12@3949.48,1984.27 3919.85,2022.54 ; pad.PA12@3958.12,1992.91 3919.85,2022.54 ; pad.PA12@3960.99,1997.03 3919.85,2022.54 ; pad.PA12@3963.42,2001.46 3919.85,2022.54 ; pad.PA12@3965.4,2006.15 3919.85,2022.54
EINT7: pad.PC1 U1.L16 | length 4222.7
  Top Layer w5: v1@2299.54,1848.27 2321.61,1862.61 v1@2307.27,1840.54 ; v1(2303,1844) 2418,1959 2418,2080 v1(2459,2121) 2440.39,2102.39 ; v1@2303,1849.5 ccw(c2303,1862.78) 2312.39,1853.39 ccw(c2321.78,1844) v1@2308.5,1844 ; v1@2453.5,2121 cw(c2440.22,2121) 2449.61,2111.61 cw(c2459,2102.22) v1@2459,2115.5 ; v1@2454.73,2124.46 2440.39,2102.39 ; v1@2462.46,2116.73 2440.39,2102.39 ; U1.L16@2774.59,2533.42 2793.27,2522.29 ; U1.L16@2777.89,2532.29 cw(c2777.89,2519.31) 2787.07,2528.49 cw(c2796.24,2537.66) U1.L16@2783.27,2537.66 ; U1.L16@2777.89,2537.66 2793.27,2522.29 ; U1.L16@2782.13,2540.96 2793.27,2522.29 ; 2793.27,2491.23 2793.27,2495 ; 2793.39,2388.45 ccw(c2815.45,2388.45) v1@2799.85,2372.85 ; 2793.39,2400.52 ccw(c2827.52,2400.52) v1@2803.39,2376.39 ; v1@2794.04,2371.8 2793.39,2398.45 ; v1@2804.7,2374.31 2793.39,2398.45 ; 2793.27,2495 2793.27,2422.94 2793.39,2422.81 2793.39,2377.5 2798.39,2372.5 v1(2799.5,2372.5) 2793.39,2398.45 ; 2793.27,2495 2793.27,2522.29
  SIGNAL_1 w5: v1@2453.54,2121.66 2459,2144 v1@2464.46,2121.66 ; v1@2455.11,2124.89 ccw(c2445.72,2134.28) 2459,2134.28 ccw(c2472.28,2134.28) v1@2462.89,2124.89 ; v1(2459,2121) 2459,2286.64 2539.36,2367 2794,2367 v1(2799.5,2372.5) v1@2799.5,2371
  Bottom Layer w5: pad.PC1@2221.8,3838.71 2203.5,3857 1971,3857 1889,3775 1889,1937.86 1982.86,1844 v1(2303,1844) ; v1@2299.11,1840.11 ccw(c2289.72,1830.72) 2289.72,1844 ccw(c2289.72,1857.28) v1@2299.11,1847.89 ; v1@2302.34,1838.54 2280,1844 v1@2302.34,1849.46
EINT8: pad.PA11 U1.N9 | length 4831.3
  Top Layer w5: v1@2694.47,2745.43 U1.N9@2710.68,2761.46 ; v1@2696.5,2747.02 U1.N9@2718.23,2753.91 ; v1@2698.78,2747.51 ccw(c2698.78,2760.79) 2708.17,2751.4 ccw(c2717.56,2742.01) v1@2704.28,2742.01 ; v1@2702.2,2737.7 U1.N9@2718.23,2753.91 ; v1@2703.78,2739.73 U1.N9@2710.68,2761.46 ; U1.N9@2709.53,2758.13 cw(c2696.55,2758.13) 2705.73,2748.96 cw(c2714.9,2739.79) U1.N9@2714.9,2752.76 ; v1(2698.78,2742.01) U1.N9@2714.9,2758.13 ; v1(2698.78,2742.01) U1.N9@2710.68,2761.46 ; v1(2698.78,2742.01) U1.N9@2718.23,2753.91 ; v1(2698.78,2742.01) U1.N9@2714.9,2758.13 ; U1.N9@2714.9,2758.13 2703.11,2738.62 U1.N9@2714.9,2758.13 ; U1.N9@2714.9,2758.13 2695.39,2746.34 U1.N9@2714.9,2758.13
  SIGNAL_2 w5: 2672.22,2736.51 ccw(c2672.22,2768.57) v1@2694.89,2745.9 ; 2684.29,2736.51 ccw(c2684.29,2756.5) v1@2698.43,2742.37 ; v1@2697.11,2747.25 2672.49,2736.51 ; v1@2697.79,2743 v1(2698.78,2742.01) ; v1@2699.35,2736.54 2672.49,2736.51 ; v1@4106.1,1891.1 cw(c4092.82,1891.1) 4102.21,1881.71 cw(c4111.6,1872.32) v1@4111.6,1885.6 ; v1@4107.33,1894.56 4092.99,1872.49 v1@4115.06,1886.83 ; v1(4111.6,1891.1) 4074.5,1854 2374,1854 2269.41,1958.59 2269.41,2087.44 2178,2178.86 2178,2716.66 2204.34,2743 2530.93,2743 2537.41,2736.51 2693.28,2736.51 v1(2698.78,2742.01) ; 2672.49,2736.51 v1(2698.78,2742.01)
  Bottom Layer w5: pad.PA11@3942.76,2084.89 3988.31,2101.28 ; pad.PA11@3944.74,2080.2 3988.31,2101.28 ; pad.PA11@3947.17,2075.77 3988.31,2101.28 ; pad.PA11@3950.03,2071.65 3988.31,2101.28 ; pad.PA11@3952.71,2065.69 pad.PA11@3954.08,2067.06 3996.12,2109.1 4135.4,2109.1 4152.3,2092.2 4152.3,1931.8 v1(4111.6,1891.1) ; pad.PA11@3954.08,2078.18 ccw(c3954.08,2105.03) 3973.06,2086.04 ccw(c3992.05,2067.06) pad.PA11@3965.2,2067.06 ; pad.PA11@3954.08,2083.18 ccw(c3954.08,2122.1) 3981.6,2094.58 ccw(c4009.12,2067.06) pad.PA11@3970.2,2067.06 ; pad.PA11@3954.08,2088.18 ccw(c3954.08,2139.17) 3990.14,2103.11 ccw(c4026.19,2067.06) pad.PA11@3975.2,2067.06 ; pad.PA11@3958.67,2063.01 3988.31,2101.28 ; pad.PA11@3962.79,2060.15 3988.31,2101.28 ; pad.PA11@3967.22,2057.71 3988.31,2101.28 ; pad.PA11@3971.91,2055.74 3988.31,2101.28 ; v1@4108.14,1895.37 4130.21,1909.71 v1@4115.87,1887.64 ; v1@4111.6,1896.6 ccw(c4111.6,1909.88) 4120.99,1900.49 ccw(c4130.38,1891.1) v1@4117.1,1891.1
EINT9: pad.PC2 U1.T9 | length 2998.7
  Top Layer w5: v1(2548,2764) 2557.51,2773.51 2604.29,2773.51 ; 2609.96,2767.84 ccw(c2620.41,2778.29) U1.T9@2620.41,2763.51 ; 2611.77,2766.03 cw(c2603.87,2758.13) U1.T9@2615.04,2758.13 ; U1.T9@2616.26,2754.72 2604.29,2773.51 ; U1.T9@2623.62,2762.44 2604.29,2773.51 ; 2604.29,2773.51 U1.T9@2620.41,2758.13 2619.66,2758.13 2604.29,2773.51
  SIGNAL_1 w5: v1(2046,2518) 2105,2518 2156.5,2569.5 2156.5,2852.55 2220.45,2916.5 2395.5,2916.5 v1(2548,2764) ; v1@2046.66,2512.54 2069,2518 v1@2046.66,2523.46 ; v1@2049.89,2514.11 cw(c2059.28,2504.72) 2059.28,2518 cw(c2059.28,2531.28) v1@2049.89,2521.89
  SIGNAL_2 w5: v1@2042.11,2514.11 ccw(c2032.72,2504.72) 2032.72,2518 ccw(c2032.72,2531.28) v1@2042.11,2521.89 ; v1@2045.34,2512.54 2023,2518 v1@2045.34,2523.46 ; v1(2046,2518) 1975,2518 1914,2579 1914,3871.5 1987,3944.5 2194.74,3944.5 pad.PC2@2221.8,3917.45
EINT11: pad.PA10 U1.R10 | length 3860.3
  Top Layer w5: v1@2631.48,2713.93 U1.R10@2647.69,2729.96 ; v1@2633.5,2715.52 U1.R10@2655.24,2722.42 ; v1@2635.79,2716.02 ccw(c2635.79,2729.29) 2645.18,2719.91 ccw(c2654.57,2710.52) v1@2641.29,2710.52 ; v1@2639.2,2706.21 U1.R10@2655.24,2722.42 ; v1@2640.79,2708.23 U1.R10@2647.69,2729.96 ; U1.R10@2646.54,2726.64 cw(c2633.56,2726.64) 2642.74,2717.46 cw(c2651.91,2708.29) U1.R10@2651.91,2721.26 ; v1(2635.79,2710.52) U1.R10@2651.91,2726.64 ; v1(2635.79,2710.52) U1.R10@2647.69,2729.96 ; v1(2635.79,2710.52) U1.R10@2655.24,2722.42 ; v1(2635.79,2710.52) U1.R10@2651.91,2726.64 ; U1.R10@2651.91,2726.64 2640.12,2707.12 U1.R10@2651.91,2726.64 ; U1.R10@2651.91,2726.64 2632.4,2714.85 U1.R10@2651.91,2726.64
  SIGNAL_2 w5: v1@2628.01,2710.52 v1(2635.79,2710.52) 2535.13,2710.52 2523.14,2722.5 2407.36,2722.5 2342.86,2658 2283,2658 2268,2643 2268,2265 2276,2257 2276,2168.14 2348,2096.14 2348,1948.14 2382.57,1913.57 2644.35,1913.57 2682.42,1875.5 3960.5,1875.5 v1(3981,1896) ; v1@2631.9,2706.63 ccw(c2622.51,2697.24) 2622.51,2710.52 ccw(c2622.51,2723.79) v1@2631.9,2714.41 ; v1@2635.13,2705.06 2612.79,2710.52 v1@2635.13,2715.98 ; v1@3975.5,1896 cw(c3962.22,1896) 3971.61,1886.61 cw(c3981,1877.22) v1@3981,1890.5 ; v1@3976.73,1899.46 3962.39,1877.39 v1@3984.46,1891.73
  Bottom Layer w5: v1@3977.54,1900.27 3999.61,1914.61 v1@3985.27,1892.54 ; v1(3981,1896) 4032.82,1947.82 ; v1@3981,1901.5 ccw(c3981,1914.78) 3990.39,1905.39 ccw(c3999.78,1896) v1@3986.5,1896 ; pad.PA10@4012.5,1982.54 4032.82,1949.69 ; pad.PA10@4017.05,1984.95 4032.82,1949.69 ; pad.PA10@4020.73,1970.99 cw(c4004.56,1947.82) 4032.82,1947.82 ; pad.PA10@4021.81,1986.71 4032.82,1949.69 ; pad.PA10@4023.59,1975.09 cw(c4011.25,1957.41) 4032.82,1957.41 cw(c4054.39,1957.41) pad.PA10@4042.04,1975.09 ; pad.PA10@4026.72,1987.83 4032.82,1949.69 ; pad.PA10@4032.82,1988.32 4032.82,1947.82 ; pad.PA10@4038.92,1987.83 4032.82,1949.69 ; pad.PA10@4043.82,1986.71 4032.82,1949.69 ; pad.PA10@4044.91,1970.99 ccw(c4061.08,1947.82) 4032.82,1947.82 ; pad.PA10@4048.58,1984.95 4032.82,1949.69 ; pad.PA10@4053.14,1982.54 4032.82,1949.69
EINT13: pad.PA9 U1.K10 | length 4528.6
  Top Layer w5: v1@2789.43,2714.4 U1.K10@2805.16,2729.95 ; v1@2791.52,2716.03 U1.K10@2812.7,2722.4 ; v1@2793.75,2716.5 ccw(c2793.75,2729.78) 2803.14,2720.39 ccw(c2812.53,2711) v1@2799.25,2711 ; v1@2797.15,2706.68 U1.K10@2812.7,2722.4 ; v1@2798.78,2708.77 U1.K10@2805.16,2729.95 ; U1.K10@2804.02,2726.64 cw(c2791.04,2726.64) 2800.22,2717.46 cw(c2809.39,2708.29) U1.K10@2809.39,2721.26 ; U1.K10@2808.64,2726.64 U1.K10@2809.39,2726.64 ; v1(2793.75,2711) U1.K10@2809.39,2726.64 ; v1(2793.75,2711) U1.K10@2805.16,2729.95 ; v1(2793.75,2711) U1.K10@2812.7,2722.4 ; v1(2793.75,2711) U1.K10@2809.39,2726.64 ; U1.K10@2809.39,2726.64 2798.09,2707.62 U1.K10@2809.39,2726.64 ; U1.K10@2809.39,2726.64 2790.38,2715.34 U1.K10@2809.39,2726.64
  SIGNAL_2 w5: 2753.77,2726.51 2533.27,2726.51 2527.28,2732.5 2212.5,2732.5 2189.5,2709.5 2189.5,2181.5 2249,2122 2308,2122 2338,2092 2338,1944 2418,1864 3996,1864 v1(4026,1894) ; 2754,2726.74 2778.01,2726.74 ; v1@2788.25,2711 ccw(c2774.97,2711) 2784.36,2720.39 ccw(c2793.75,2729.78) v1@2793.75,2716.5 ; v1@2789.41,2707.62 2778.01,2726.74 ; v1@2797.13,2715.34 2778.01,2726.74 ; v1@4020.5,1894 cw(c4007.22,1894) 4016.61,1884.61 cw(c4026,1875.22) v1@4026,1888.5 ; v1@4021.73,1897.46 4007.39,1875.39 v1@4029.46,1889.73 ; 2778.01,2726.74 v1(2793.75,2711) 2778.01,2726.74
  Bottom Layer w5: pad.PA9@4021.5,2049.22 4067.05,2032.83 ; v1@4022.54,1898.27 4044.61,1912.61 v1@4030.27,1890.54 ; pad.PA9@4023.48,2053.92 4067.05,2032.83 ; pad.PA9@4025.91,2058.34 4067.05,2032.83 ; v1(4026,1894) 4068,1936 4068,2031.87 pad.PA9@4032.82,2067.06 ; v1@4026,1899.5 ccw(c4026,1912.78) 4035.39,1903.39 ccw(c4044.78,1894) v1@4031.5,1894 ; pad.PA9@4028.77,2062.46 4067.05,2032.83 ; pad.PA9@4033.01,2055.94 cw(c4033.46,2030.65) 4051.34,2048.53 cw(c4069.23,2066.42) pad.PA9@4043.94,2066.86 ; pad.PA9@4033.1,2050.94 cw(c4033.75,2014.28) 4059.67,2040.2 cw(c4085.59,2066.13) pad.PA9@4048.94,2066.77 ; pad.PA9@4033.19,2045.94 cw(c4034.03,1997.91) 4068,2031.88 cw(c4101.96,2065.84) pad.PA9@4053.94,2066.68 ; pad.PA9@4037.41,2071.1 4067.05,2032.83 ; pad.PA9@4041.53,2073.97 4067.05,2032.83 ; pad.PA9@4045.96,2076.4 4067.05,2032.83 ; pad.PA9@4050.65,2078.37 4067.05,2032.83
EINT14: pad.PA8 U1.R11 | length 2944.7
  Top Layer w5: U1.R11@2651.91,2689.77 cw(c2651.91,2676.79) 2661.08,2685.97 cw(c2670.26,2695.14) U1.R11@2657.28,2695.14 ; v1@2662.5,2679.05 ccw(c2649.22,2679.05) 2658.61,2688.44 ccw(c2668,2697.83) v1@2668,2684.55 ; v1@2662.99,2676.77 U1.R11@2656.13,2698.47 ; v1@2663.67,2675.66 U1.R11@2651.91,2695.14 ; v1@2664.59,2674.74 U1.R11@2648.59,2690.92 ; v1@2670.28,2684.06 U1.R11@2648.59,2690.92 ; v1@2671.39,2683.38 U1.R11@2651.91,2695.14 ; v1@2672.31,2682.47 U1.R11@2656.13,2698.47 ; U1.R11@2648.59,2690.92 v1(2668,2679.05) ; U1.R11@2648.59,2690.92 v1(2668,2679.05) ; U1.R11@2651.91,2695.14 v1(2668,2679.05) ; U1.R11@2651.91,2695.14 v1(2668,2679.05) ; U1.R11@2656.13,2698.47 v1(2668,2679.05) ; U1.R11@2656.13,2698.47 v1(2668,2679.05)
  SIGNAL_2 w5: v1@2662.5,2679.05 cw(c2649.22,2679.05) 2658.61,2669.66 cw(c2668,2660.27) v1@2668,2673.55 ; v1@2663.65,2682.42 2652.47,2663.52 ; v1@2671.37,2674.71 2652.47,2663.52 ; pad.PA8@4090.56,1986.01 cw(c4055.48,1982.15) 4080.44,1957.2 ; pad.PA8@4093.48,1999.23 4080.44,1957.19 ; pad.PA8@4095.53,1986.55 cw(c4068.76,1983.61) 4087.81,1964.56 cw(c4106.85,1945.52) pad.PA8@4109.8,1972.29 ; pad.PA8@4098.27,1997.44 4080.44,1957.19 ; pad.PA8@4102.77,1995.12 4080.44,1957.19 ; pad.PA8@4106.94,1992.33 4080.44,1957.19 ; pad.PA8@4109.25,1967.32 ccw(c4105.39,1932.24) 4080.44,1957.2 ; pad.PA8@4115.58,1983.7 4080.44,1957.19 ; pad.PA8@4118.37,1979.52 4080.44,1957.19 ; pad.PA8@4120.68,1975.02 4080.44,1957.19 ; pad.PA8@4122.48,1970.23 4080.44,1957.19 ; 2652.47,2663.52 v1(2668,2679.05) 2652.47,2663.52 ; 2652.47,2663.52 2652.47,2502.46 2642.5,2492.49 2642.5,2349.5 2850.5,2141.5 2945.51,2141.5 2972.01,2115 3005.27,2115 3053,2067.27 3053,1979.24 3075.05,1957.19 4080.44,1957.19 ; 4080.44,1957.19 pad.PA8@4111.56,1988.32 4080.44,1957.19
EINT15: pad.PA7 U1.L10 | length 5432.4
  Top Layer w5: v1@2757.49,2714.48 U1.L10@2773.67,2729.96 ; v1@2759.57,2716.05 U1.L10@2781.21,2722.41 ; v1@2761.76,2716.5 ccw(c2761.76,2730.99) 2772,2720.74 ; v1@2765.1,2706.63 U1.L10@2781.21,2722.41 ; v1@2766.74,2708.67 U1.L10@2773.67,2729.96 ; v1@2767.26,2711 cw(c2779.33,2711) 2770.79,2719.54 ; U1.L10@2772.52,2726.64 cw(c2759.55,2726.64) 2768.72,2717.46 cw(c2777.89,2708.29) U1.L10@2777.89,2721.26 ; U1.L10@2777.15,2726.64 U1.L10@2777.89,2726.64 ; v1(2761.76,2711) U1.L10@2777.89,2726.64 ; v1(2761.76,2711) U1.L10@2773.67,2729.96 ; v1(2761.76,2711) U1.L10@2781.21,2722.41 ; v1(2761.76,2711) U1.L10@2777.89,2726.64 ; v1@2762.01,2710.75 U1.L10@2777.89,2726.64 ; v1@2762.01,2710.75 U1.L10@2773.67,2729.96 ; v1@2762.01,2710.75 U1.L10@2781.21,2722.41 ; v1@2762.01,2710.75 U1.L10@2777.89,2726.64 ; U1.L10@2777.89,2726.64 2766.04,2707.55 U1.L10@2777.89,2726.64 ; U1.L10@2777.89,2726.64 2758.44,2715.39 U1.L10@2777.89,2726.64
  SIGNAL_1 w5: v1@1976.37,2436.51 1999.09,2440.8 ; v1@1976.94,2447.42 1999.09,2440.8 ; v1@1979.89,2438.11 cw(c1986.38,2431.62) 1986.38,2440.8 ; v1@1979.89,2445.89 ccw(c1992.18,2458.18) 1992.18,2440.8 ; 2166.5,2661.5 2166.5,2724 ; 2751.08,2720.92 ccw(c2761.76,2731.6) v1@2761.76,2716.5 ; 2752.9,2719.1 cw(c2744.8,2711) v1@2756.26,2711 ; v1@2757.5,2707.51 2745.49,2726.51 ; v1@2761.76,2710.5 2761.5,2710.5 2761.38,2710.62 2745.49,2726.51 ; v1(2761.76,2711) 2745.49,2726.51 ; v1@2765.04,2715.41 2745.49,2726.51 ; 1999.09,2440.8 v1(1976,2442) 1977.2,2440.8 2095.92,2440.8 2166.5,2511.38 2166.5,2724 ; 2166.5,2724 2166.5,2848.41 2224.59,2906.5 2380.7,2906.5 2551.19,2736.02 2660.5,2736.02 2670,2726.51 2745.49,2726.51
  Bottom Layer w5: 1970,2414.24 cw(c2003.76,2414.24) v1@1979.89,2438.11 ; 1970,2426.31 cw(c1991.69,2426.31) v1@1976.35,2441.65 ; v1@1970.54,2442.65 1970,2414.77 ; v1@1981.23,2440.29 1970,2414.77 ; pad.PA7@4090.47,2065.96 cw(c4047.77,2063.73) 4078,2033.5 ; pad.PA7@4093.68,2078.29 4078,2033.5 ; pad.PA7@4095.46,2066.22 cw(c4062.87,2064.52) 4085.95,2041.44 cw(c4109.02,2018.37) pad.PA7@4110.72,2050.96 ; pad.PA7@4098.39,2076.35 4078,2033.5 ; pad.PA7@4100.45,2066.48 cw(c4077.97,2065.3) 4093.89,2049.39 cw(c4109.81,2033.47) pad.PA7@4110.98,2055.95 ; pad.PA7@4102.83,2073.94 4078,2033.5 ; pad.PA7@4106.96,2071.1 4078,2033.5 ; pad.PA7@4110.46,2045.96 ccw(c4108.23,2003.26) 4078,2033.5 ; pad.PA7@4115.6,2062.46 4078,2033.5 ; pad.PA7@4118.45,2058.32 4078,2033.5 ; pad.PA7@4120.86,2053.89 4078,2033.5 ; pad.PA7@4122.8,2049.17 4078,2033.5 ; 1970,2414.77 v1(1976,2442) 1970,2436 1970,1970 2010,1930 3439,1930 3499,1870 4042,1870 4078,1906 4078,2033.5 ; 4078,2033.5 pad.PA7@4111.56,2067.06 4078,2033.5
EINT16: pad.PA6 U1.T10 | length 3231
  Top Layer w5: v1(2538,2684) 2565.26,2711.26 2601,2711.26 ; v1@2538,2689.5 ccw(c2538,2702.78) 2547.39,2693.39 ccw(c2556.78,2684) v1@2543.5,2684 ; 2595,2711.26 2601,2711.26 ; 2609.96,2716.94 cw(c2620.41,2706.48) U1.T10@2620.41,2721.26 ; 2611.77,2718.74 ccw(c2603.87,2726.64) U1.T10@2615.04,2726.64 ; U1.T10@2616.26,2730.05 2604.29,2711.26 ; U1.T10@2623.62,2722.33 2604.29,2711.26 ; 2601,2711.26 2604.29,2711.26 ; 2604.29,2711.26 U1.T10@2620.41,2726.64 2619.66,2726.64 2604.29,2711.26
  SIGNAL_2 w5: v1@2532.5,2684 cw(c2519.22,2684) 2528.61,2674.61 cw(c2538,2665.22) v1@2538,2678.5 ; v1@2533.65,2687.37 2522.5,2668.5 ; v1@2541.37,2679.65 2522.5,2668.5 ; pad.PA6@4169.18,1988.32 cw(c4118.19,1988.32) 4154.24,1952.26 cw(c4190.3,1916.2) pad.PA6@4190.3,1967.19 ; pad.PA6@4172.47,1999.63 4156.07,1954.09 ; pad.PA6@4174.18,1988.32 cw(c4135.26,1988.32) 4162.78,1960.79 cw(c4190.3,1933.27) pad.PA6@4190.3,1972.19 ; pad.PA6@4177.16,1997.66 4156.07,1954.09 ; pad.PA6@4179.18,1988.32 cw(c4152.33,1988.32) 4171.31,1969.33 cw(c4190.3,1950.34) pad.PA6@4190.3,1977.19 ; pad.PA6@4181.58,1995.22 4156.07,1954.09 ; pad.PA6@4185.71,1992.36 4156.07,1954.09 ; pad.PA6@4194.35,1983.72 4156.07,1954.09 ; pad.PA6@4197.21,1979.6 4156.07,1954.09 ; pad.PA6@4199.64,1975.18 4156.07,1954.09 ; pad.PA6@4201.62,1970.48 4156.07,1954.09 ; 2522.5,2668.5 v1(2538,2684) 2522.5,2668.5 ; 2522.5,2668.5 2522.5,2278.07 2635.57,2165 2748.18,2165 2817.5,2095.68 2817.5,1978.52 2858.82,1937.19 4139.18,1937.19 pad.PA6@4190.3,1988.32 4156.07,1954.09
EINT17: pad.PA5 U1.M11 | length 3756.1
  Top Layer w5: v1@2725.78,2707.52 U1.M11@2742.18,2691.82 ; v1@2727.83,2705.96 U1.M11@2749.72,2699.36 ; v1@2730.04,2705.5 cw(c2730.04,2691.01) 2740.28,2701.26 ; v1@2733.39,2715.36 U1.M11@2749.72,2699.36 ; v1@2735.01,2713.36 U1.M11@2742.18,2691.82 ; v1@2735.54,2711 ccw(c2747.61,2711) 2739.08,2702.46 ; U1.M11@2741.02,2695.14 ccw(c2728.05,2695.14) 2737.22,2704.32 ccw(c2746.4,2713.49) U1.M11@2746.4,2700.52 ; v1(2730.04,2711) U1.M11@2746.4,2695.14 ; v1(2730.04,2711) U1.M11@2749.72,2699.36 ; v1(2730.04,2711) U1.M11@2742.18,2691.82 ; v1(2730.04,2711) U1.M11@2746.4,2695.14 ; v1@2730.29,2711.25 U1.M11@2746.4,2695.14 ; v1@2730.29,2711.25 U1.M11@2749.72,2699.36 ; v1@2730.29,2711.25 U1.M11@2742.18,2691.82 ; v1@2730.29,2711.25 U1.M11@2746.4,2695.14 ; U1.M11@2746.4,2695.14 2726.72,2706.62 U1.M11@2746.4,2695.14 ; U1.M11@2746.4,2695.14 2734.32,2714.46 U1.M11@2746.4,2695.14
  SIGNAL_2 w5: v1@2547.5,2648 cw(c2534.22,2648) 2543.61,2638.61 cw(c2553,2629.22) v1@2553,2642.5 ; v1@2548.73,2651.46 2534.39,2629.39 v1@2556.46,2643.73 ; v1(2553,2648) 2532.5,2627.5 2532.5,2282.22 2639.72,2175 2752.33,2175 2825.83,2101.5 2864.5,2101.5 2887,2079 2887,1973.62 2913.42,1947.19 4114.45,1947.19 4151,1983.74 4151,2027.76 pad.PA5@4190.3,2067.06 ; pad.PA5@4169.18,2067.06 cw(c4118.19,2067.06) 4154.24,2031 cw(c4190.3,1994.94) pad.PA5@4190.3,2045.93 ; pad.PA5@4172.47,2078.37 4156.07,2032.83 ; pad.PA5@4174.18,2067.06 cw(c4135.26,2067.06) 4162.78,2039.53 cw(c4190.3,2012.01) pad.PA5@4190.3,2050.93 ; pad.PA5@4177.16,2076.4 4156.07,2032.83 ; pad.PA5@4179.18,2067.06 cw(c4152.33,2067.06) 4171.31,2048.07 cw(c4190.3,2029.08) pad.PA5@4190.3,2055.93 ; pad.PA5@4181.58,2073.97 4156.07,2032.83 ; pad.PA5@4185.71,2071.1 4156.07,2032.83 ; pad.PA5@4194.35,2062.46 4156.07,2032.83 ; pad.PA5@4197.21,2058.34 4156.07,2032.83 ; pad.PA5@4199.64,2053.92 4156.07,2032.83 ; pad.PA5@4201.62,2049.22 4156.07,2032.83
  Bottom Layer w5: v1@2550.02,2652.62 2573.26,2664.34 ; v1@2553,2648.5 ccw(c2553,2659.17) 2560.55,2651.63 ; v1@2553,2653.5 ccw(c2553,2676.24) 2569.08,2660.16 ; v1@2556.89,2644.11 2573.26,2664.34 ; 2720.3,2700.76 ccw(c2710.05,2711) v1@2724.54,2711 ; 2721.5,2701.96 cw(c2730.04,2693.43) v1@2730.04,2705.5 ; v1@2725.63,2714.29 2715.04,2695.5 ; v1(2730.04,2711) 2715.04,2695.5 ; v1@2730.54,2711 2730.29,2710.75 2715.04,2695.5 ; v1@2733.47,2706.7 2715.04,2695.5 ; 2573.26,2664.34 v1(2553,2648) 2556.92,2648 2584.5,2675.58 2584.5,2683.5 2596.08,2695.08 2609.92,2695.08 2609.98,2695.02 2642.21,2695.02 2642.69,2695.5 2715.04,2695.5
EINT18: pad.PA4 U1.N10 | length 4073.3
  Top Layer w5: v1@2694.94,2714.4 U1.N10@2710.67,2729.95 ; v1@2697.04,2716.03 U1.N10@2718.21,2722.4 ; v1@2699.26,2716.5 ccw(c2699.26,2729.78) 2708.65,2720.39 ccw(c2718.04,2711) v1@2704.76,2711 ; v1@2702.66,2706.68 U1.N10@2718.21,2722.4 ; v1@2704.29,2708.77 U1.N10@2710.67,2729.95 ; U1.N10@2709.53,2726.64 cw(c2696.55,2726.64) 2705.73,2717.46 cw(c2714.9,2708.29) U1.N10@2714.9,2721.26 ; v1(2699.26,2711) U1.N10@2714.9,2726.64 ; v1(2699.26,2711) U1.N10@2710.67,2729.95 ; v1(2699.26,2711) U1.N10@2718.21,2722.4 ; v1(2699.26,2711) U1.N10@2714.9,2726.64 ; U1.N10@2714.9,2726.64 2703.61,2707.62 U1.N10@2714.9,2726.64 ; U1.N10@2714.9,2726.64 2695.89,2715.34 U1.N10@2714.9,2726.64
  SIGNAL_2 w5: v1@2378.54,2628.23 2400.61,2613.89 v1@2386.27,2635.96 ; v1@2382,2627 cw(c2382,2613.72) 2391.39,2623.11 cw(c2400.78,2632.5) v1@2387.5,2632.5 ; v1(2382,2632.5) 2412.86,2601.64 2412.86,2284.22 2542.08,2155 2744.04,2155 2807.5,2091.54 2807.5,1966.5 2846.81,1927.19 4207.92,1927.19 pad.PA4@4269.04,1988.32 4234.81,1954.09 ; pad.PA4@4247.92,1988.32 cw(c4196.93,1988.32) 4232.98,1952.26 cw(c4269.04,1916.2) pad.PA4@4269.04,1967.19 ; pad.PA4@4251.21,1999.63 4234.81,1954.09 ; pad.PA4@4252.92,1988.32 cw(c4214,1988.32) 4241.52,1960.79 cw(c4269.04,1933.27) pad.PA4@4269.04,1972.19 ; pad.PA4@4255.9,1997.66 4234.81,1954.09 ; pad.PA4@4257.92,1988.32 cw(c4231.07,1988.32) 4250.05,1969.33 cw(c4269.04,1950.34) pad.PA4@4269.04,1977.19 ; pad.PA4@4260.32,1995.22 4234.81,1954.09 ; pad.PA4@4264.45,1992.36 4234.81,1954.09 ; pad.PA4@4273.09,1983.72 4234.81,1954.09 ; pad.PA4@4275.95,1979.6 4234.81,1954.09 ; pad.PA4@4278.38,1975.18 4234.81,1954.09 ; pad.PA4@4280.36,1970.48 4234.81,1954.09
  Bottom Layer w5: v1@2376.54,2633.16 2382,2655.5 v1@2387.46,2633.16 ; v1@2378.11,2636.39 ccw(c2368.72,2645.78) 2382,2645.78 ccw(c2395.28,2645.78) v1@2385.89,2636.39 ; v1(2382,2632.5) 2382,2733.55 2425.45,2777 2498.36,2777 2548.86,2726.5 2686.5,2726.5 ; 2687.94,2725.06 cw(c2673.88,2711) v1@2693.76,2711 ; 2694.55,2718.45 ccw(c2699.26,2723.17) v1@2699.26,2716.5 ; v1@2694.58,2708.12 2686.5,2726.5 ; v1(2699.26,2711) 2686.5,2726.5 ; v1@2699.26,2713.74 2686.5,2726.5 ; v1@2702.99,2715.04 2686.5,2726.5